# Altium PCB Board_Layout.PcbDoc (part 1 of 2)
Units mil, origin at the board's own origin, x right, y up, seen from the top; angles counter-clockwise.
Board outline 4005 x 2010 mil, 4 copper layers (Top Layer, Power, Ground, Bottom Layer); 140 components, 129 nets, 567 pads, 245 vias.
Unrouted connection lines stored in the file: 278.
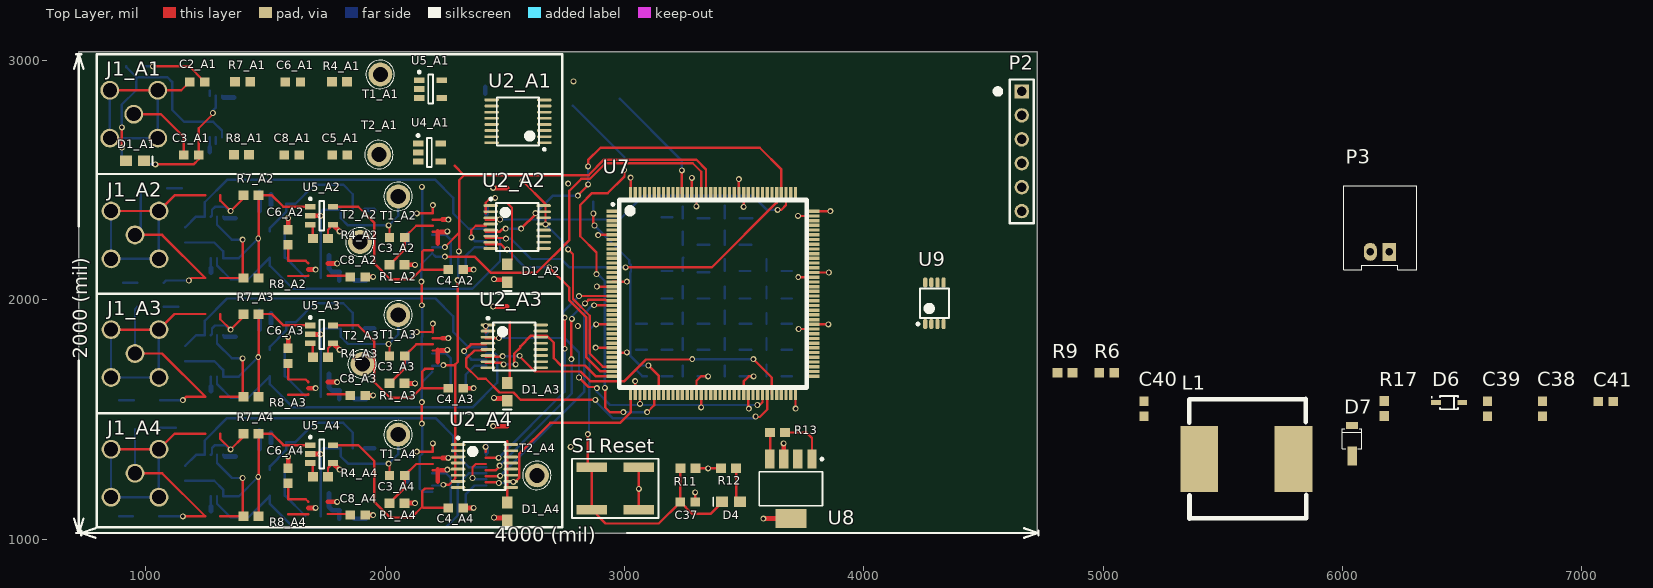
[diagram p0: Top Layer view]
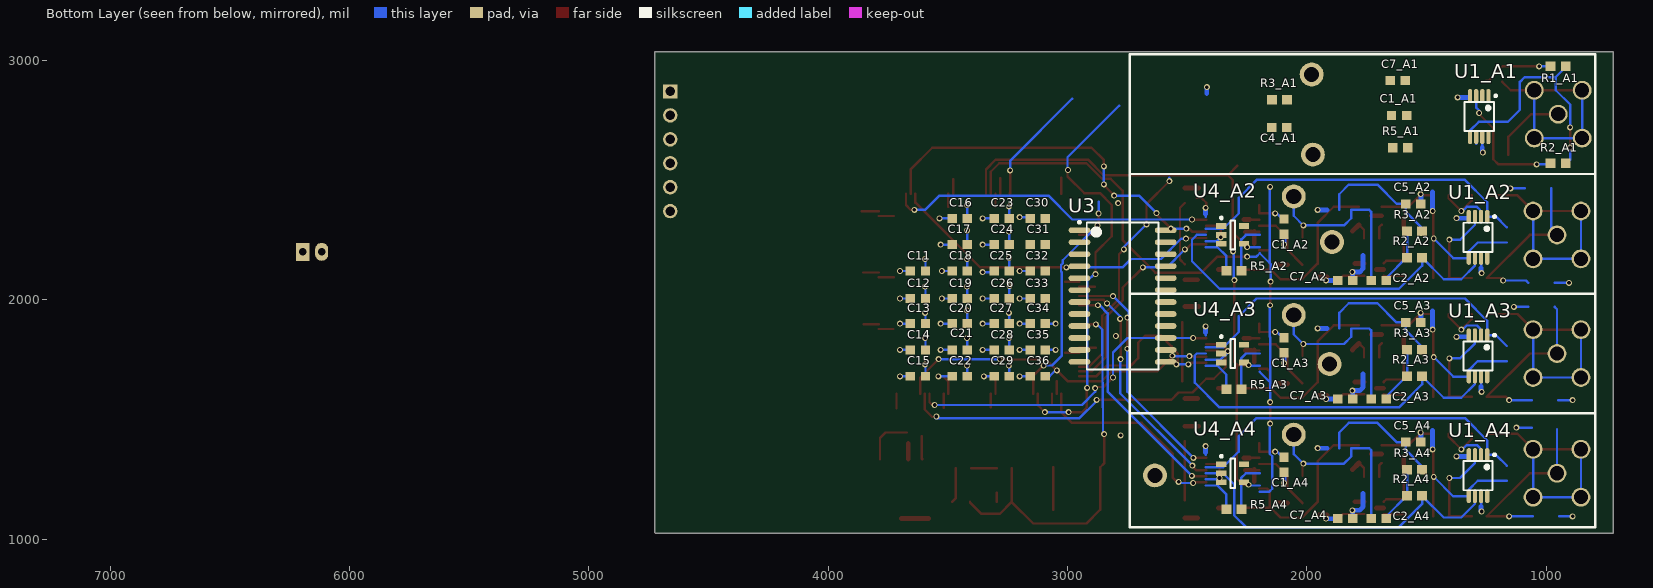
[diagram p1: Bottom Layer view, seen from below]
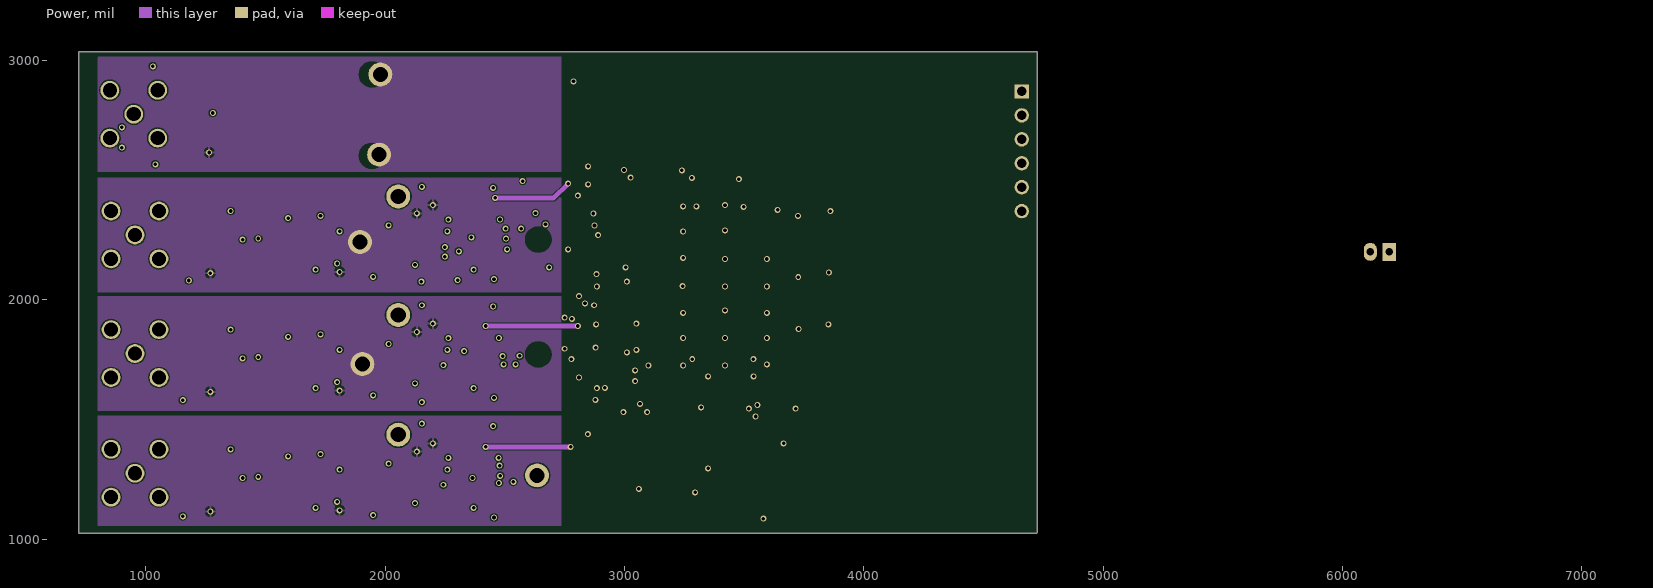
[diagram p2: Power]
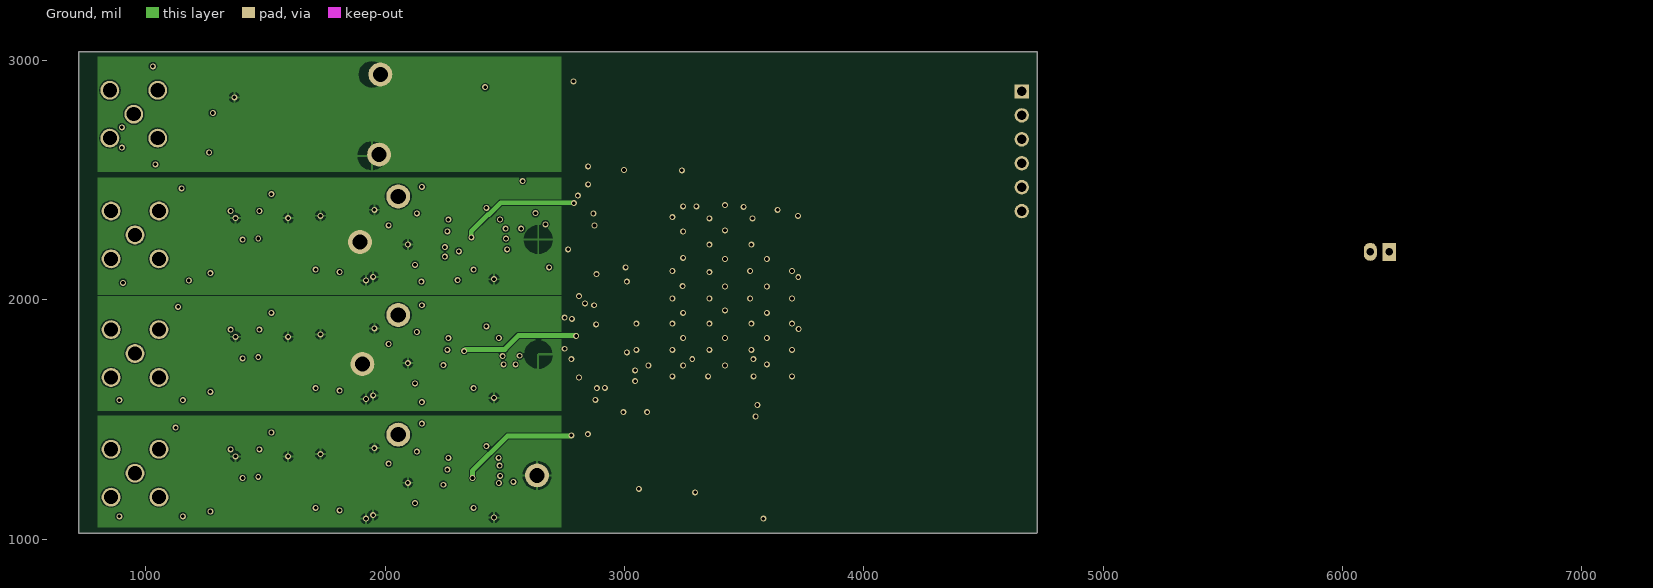
[diagram p3: Ground]

## Layer stack, top to bottom
Top Layer: signal copper 1.4
Dielectric: core 12.6, FR-4, Dk 4.8
Power: signal copper 1.4
Dielectric: prepreg 12.6, FR-4, Dk 4.8
Ground: signal copper 1.4
Dielectric: core 12.6, FR-4, Dk 4.8
Bottom Layer: signal copper 1.4

## Board outline
4725,3035 720,3035 720,1025 4721.67,1025 4725,1028.33 4725,3035

## Design rules (kind name [scope] priority, off if disabled: settings)
Clearance [All] p1: gap=5
PolygonConnect [All] p1: connectstyle=Relief reliefconductorwidth=10 reliefentries=4 polygonreliefangle="90 Angle" airgapwidth=10
RoomDefinition A2 [InComponentClass('A2')] p1: confinementstyle=ConfineIn formatcopy=TRUE lockcomponents=FALSE outline 800,2030.51 2740,2030.51 2740,2510.51 800,2510.51
RoomDefinition A1 [InComponentClass('A1')] p2: confinementstyle=ConfineIn formatcopy=TRUE lockcomponents=FALSE outline 795,2535 2735,2535 2735,3015 795,3015
RoomDefinition A4 [InComponentClass('A4')] p3: confinementstyle=ConfineIn formatcopy=TRUE lockcomponents=FALSE outline 800,1035 2740,1035 2740,1515 800,1515
RoomDefinition A3 [InComponentClass('A3')] p4: confinementstyle=ConfineIn formatcopy=TRUE lockcomponents=FALSE outline 800,1535 2740,1535 2740,2015 800,2015
RoutingCorners [All] p1: cornerstyle=Round minsetback=100 maxsetback=100
RoutingVias [All] p1: holewidth=15 width=25 viastyle="Through Hole" minholewidth=15 minwidth=25 maxholewidth=28 maxwidth=50
SolderMaskExpansion [All] p1: expansion=4
Width [All] p1: maxlimit=20 minlimit=10 preferedwidth=10
Width APWR [InNetClass('APower')] p2: maxlimit=20 minlimit=20 preferedwidth=20
Width AGND [InNetClass('AGround')] p3: maxlimit=20 minlimit=10 preferedwidth=20
27 further rules are at their usual default settings.

## Classes and differential pairs
channel class Analog: U_Analog1 U_Analog2 U_Analog3 U_Analog4
component class A1: C1_A1 C1_U_Analog4 C2_A1 C2_U_Analog4 C3_A1 C3_U_Analog4 C4_A1 C4_U_Analog4 C5_A1 C5_U_Analog4 C6_A1 C6_U_Analog4 C7_A1 C7_U_Analog4 C8_A1 C8_U_Analog4 D1_A1 J1_A1 R1_A1 R1_U_Analog4 R2_A1 R2_U_Analog4 R3_A1 R3_U_Analog4 R4_A1 R4_U_Analog4 R5_A1 R5_U_Analog4 R6_U_Analog4 R7_A1 R8_A1 T1_A1 T1_U_Analog4 T2_A1 U1_A1 U2_A1 U4_A1 U5_A1
component class A2: C1_A2 C1_U_Analog3 C2_A2 C2_U_Analog3 C3_A2 C3_U_Analog3 C4_A2 C4_U_Analog3 C5_A2 C5_U_Analog3 C6_A2 C6_U_Analog3 C7_A2 C7_U_Analog3 C8_A2 C8_U_Analog3 D1_A2 J1_A2 R1_A2 R1_U_Analog3 R2_A2 R2_U_Analog3 R3_A2 R3_U_Analog3 R4_A2 R4_U_Analog3 R5_A2 R5_U_Analog3 R6_U_Analog3 R7_A2 R8_A2 T1_A2 T1_U_Analog3 T2_A2 U1_A2 U2_A2 U4_A2 U5_A2
component class A3: C1_A3 C1_U_Analog2 C2_A3 C2_U_Analog2 C3_A3 C3_U_Analog2 C4_A3 C4_U_Analog2 C5_A3 C5_U_Analog2 C6_A3 C6_U_Analog2 C7_A3 C7_U_Analog2 C8_A3 C8_U_Analog2 D1_A3 J1_A3 R1_A3 R1_U_Analog2 R2_A3 R2_U_Analog2 R3_A3 R3_U_Analog2 R4_A3 R4_U_Analog2 R5_A3 R5_U_Analog2 R6_U_Analog2 R7_A3 R8_A3 T1_A3 T1_U_Analog2 T2_A3 U1_A3 U2_A3 U4_A3 U5_A3
component class A4: C1_A4 C1_U_Analog1 C2_A4 C2_U_Analog1 C3_A4 C3_U_Analog1 C4_A4 C4_U_Analog1 C5_A4 C5_U_Analog1 C6_A4 C6_U_Analog1 C7_A4 C7_U_Analog1 C8_A4 C8_U_Analog1 D1_A4 J1_A4 R1_A4 R1_U_Analog1 R2_A4 R2_U_Analog1 R3_A4 R3_U_Analog1 R4_A4 R4_U_Analog1 R5_A4 R5_U_Analog1 R6_U_Analog1 R7_A4 R8_A4 T1_A4 T1_U_Analog1 T2_A4 U1_A4 U2_A4 U4_A4 U5_A4
net class AGround: AGND_A1 AGND_A2 AGND_A3 AGND_A4
net class APower: 4.2V_A1 4.2V_A2 4.2V_A3 4.2V_A4
component class U_Digital: C11 C12 C13 C14 C15 C16 C17 C18 C19 C20 C21 C22 C23 C24 C25 C26 C27 C28 C29 C30 C31 C32 C33 C34 C35 C36 C37 C38 C39 C40 C41 D4 D6 D7 L1 P2 P3 R6 R9 R11 R12 R13 R17 S1 U3 U7 U8 U9

## Components (designator, comment, footprint, x,y, rotation, side; value= is the part's Value field where it differs from the comment)
C1_A1 "Cap" CAPC0603 1615,2770 r180 bottom (schematic designator C1)
C1_A2 "Cap" CAPC0603 2095,2305.51 r90 bottom (schematic designator C1)
C1_A3 "Cap" CAPC0603 2095,1810 r90 bottom (schematic designator C1)
C1_A4 "Cap" CAPC0603 2095,1310 r90 bottom (schematic designator C1)
C2_A1 "Cap" CAPC0603 1215,2910 r0 top (schematic designator C2)
C2_A2 "Cap" CAPC0603 1700,2080.51 r0 bottom (schematic designator C2)
C2_A3 "Cap" CAPC0603 1700,1585 r0 bottom (schematic designator C2)
C2_A4 "Cap" CAPC0603 1700,1085 r0 bottom (schematic designator C2)
C3_A1 "Cap" CAPC0603 1190,2605 r0 top (schematic designator C3)
C3_A2 "Cap" CAPC0603 2050,2260.51 r0 top (schematic designator C3)
C3_A3 "Cap" CAPC0603 2050,1765 r0 top (schematic designator C3)
C3_A4 "Cap" CAPC0603 2050,1265 r0 top (schematic designator C3)
C4_A1 "Cap" CAPC0603 2115,2720 r0 bottom (schematic designator C4)
C4_A2 "Cap" CAPC0603 2295,2125.51 r180 top (schematic designator C4)
C4_A3 "Cap" CAPC0603 2295,1630 r180 top (schematic designator C4)
C4_A4 "Cap" CAPC0603 2295,1130 r180 top (schematic designator C4)
C5_A1 "Cap" CAPC0603 1810,2605 r0 top (schematic designator C5)
C5_A2 "Cap" CAPC0603 1555,2400.51 r180 bottom (schematic designator C5)
C5_A3 "Cap" CAPC0603 1555,1905 r180 bottom (schematic designator C5)
C5_A4 "Cap" CAPC0603 1555,1405 r180 bottom (schematic designator C5)
C6_A1 "Cap" CAPC0603 1615,2910 r180 top (schematic designator C6)
C6_A2 "Cap" CAPC0603 1595,2260.51 r270 top (schematic designator C6)
C6_A3 "Cap" CAPC0603 1595,1765 r270 top (schematic designator C6)
C6_A4 "Cap" CAPC0603 1595,1265 r270 top (schematic designator C6)
C7_A1 "Cap" CAPC0603 1620,2915 r180 bottom (schematic designator C7)
C7_A2 "Cap" CAPC0603 1840,2080.51 r180 bottom (schematic designator C7)
C7_A3 "Cap" CAPC0603 1840,1585 r180 bottom (schematic designator C7)
C7_A4 "Cap" CAPC0603 1840,1085 r180 bottom (schematic designator C7)
C8_A1 "Cap" CAPC0603 1610,2605 r180 top (schematic designator C8)
C8_A2 "Cap" CAPC0603 1885,2095.51 r180 top (schematic designator C8)
C8_A3 "Cap" CAPC0603 1885,1600 r180 top (schematic designator C8)
C8_A4 "Cap" CAPC0603 1885,1100 r180 top (schematic designator C8)
C11 "Cap" CAPC0603 3625,2120 r0 bottom
C12 "Cap" CAPC0603 3625,2005 r0 bottom
C13 "Cap" CAPC0603 3625,1900 r0 bottom
C14 "Cap" CAPC0603 3625,1790 r0 bottom
C15 "Cap" CAPC0603 3625,1680 r0 bottom
C16 "Cap" CAPC0603 3450,2340 r0 bottom
C17 "Cap" CAPC0603 3450,2230 r0 bottom
C18 "Cap" CAPC0603 3450,2120 r0 bottom
C19 "Cap" CAPC0603 3450,2005 r0 bottom
C20 "Cap" CAPC0603 3450,1900 r0 bottom
C21 "Cap" CAPC0603 3450,1790 r0 bottom
C22 "Cap" CAPC0603 3450,1680 r0 bottom
C23 "Cap" CAPC0603 3275,2340 r0 bottom
C24 "Cap" CAPC0603 3275,2230 r0 bottom
C25 "Cap" CAPC0603 3275,2120 r0 bottom
C26 "Cap" CAPC0603 3275,2005 r0 bottom
C27 "Cap" CAPC0603 3275,1900 r0 bottom
C28 "Cap" CAPC0603 3275,1790 r0 bottom
C29 "Cap" CAPC0603 3275,1680 r0 bottom
C30 "Cap" CAPC0603 3125,2340 r0 bottom
C31 "Cap" CAPC0603 3125,2230 r0 bottom
C32 "Cap" CAPC0603 3125,2120 r0 bottom
C33 "Cap" CAPC0603 3125,2005 r0 bottom
C34 "Cap" CAPC0603 3125,1900 r0 bottom
C35 "Cap" CAPC0603 3125,1790 r0 bottom
C36 "Cap" CAPC0603 3125,1680 r0 bottom
C37 "Cap" CAPC0603 3265,1155 r0 top
C38 "Cap" CAPC0603 6835,1545 r90 top
C39 "Cap" CAPC0603 6605,1545 r90 top
C40 "Cap" CAPC0603 5170,1545 r90 top
C41 "Cap" CAPC0603 7100,1575 r0 top
D1_A1 "LED-RED" LED0805-RED 955,2580 r180 top (schematic designator D1)
D1_A2 "LED-RED" LED0805-RED 2510,2110.51 r90 top (schematic designator D1)
D1_A3 "LED-RED" LED0805-RED 2510,1615 r90 top (schematic designator D1)
D1_A4 "LED-RED" LED0805-RED 2510,1115 r90 top (schematic designator D1)
D4 "LED-RED" LED0805-RED 3445,1155 r0 top
D6 "Schottky" SOD-323F 6445,1570 r0 top
D7 "UPS120" DO-216AA 6040,1475 r90 top
J1_A1 "MCX_Female_RA" MCX_Female 950,2775 r0 top (schematic designator J1)
J1_A2 "MCX_Female_RA" MCX_Female 955,2270.51 r0 top (schematic designator J1)
J1_A3 "MCX_Female_RA" MCX_Female 955,1775 r0 top (schematic designator J1)
J1_A4 "MCX_Female_RA" MCX_Female 955,1275 r0 top (schematic designator J1)
L1 "5uH" IND_2 5795,1335 r0 top
P2 "SWD" SWD_STM32 4660,2870 r0 top
P3 "2-pin Horz Sherlock" MOLEX-HDR-1X2-SHERLOCK-HORZ 6195,2200 r0 top
R1_A1 "Res" RES0603 950,2975 r0 bottom (schematic designator R1)
R1_A2 "Res" RES0603 2050,2145.51 r180 top (schematic designator R1)
R1_A3 "Res" RES0603 2050,1650 r180 top (schematic designator R1)
R1_A4 "Res" RES0603 2050,1150 r180 top (schematic designator R1)
R2_A1 "Res" RES0603 950,2570 r180 bottom (schematic designator R2)
R2_A2 "Res" RES0603 1550,2175.51 r0 bottom (schematic designator R2)
R2_A3 "Res" RES0603 1550,1680 r0 bottom (schematic designator R2)
R2_A4 "Res" RES0603 1550,1180 r0 bottom (schematic designator R2)
R3_A1 "Res" RES0603 2115,2835 r180 bottom (schematic designator R3)
R3_A2 "Res" RES0603 1550,2285.51 r180 bottom (schematic designator R3)
R3_A3 "Res" RES0603 1550,1790 r180 bottom (schematic designator R3)
R3_A4 "Res" RES0603 1550,1290 r180 bottom (schematic designator R3)
R4_A1 "Res" RES0603 1810,2910 r0 top (schematic designator R4)
R4_A2 "Res" RES0603 1730,2255.51 r0 top (schematic designator R4)
R4_A3 "Res" RES0603 1730,1760 r0 top (schematic designator R4)
R4_A4 "Res" RES0603 1730,1260 r0 top (schematic designator R4)
R5_A1 "Res" RES0603 1610,2635 r180 bottom (schematic designator R5)
R5_A2 "Res" RES0603 2305,2120.51 r180 bottom (schematic designator R5)
R5_A3 "Res" RES0603 2305,1625 r180 bottom (schematic designator R5)
R5_A4 "Res" RES0603 2305,1125 r180 bottom (schematic designator R5)
R6 "Res" RES0603 5015,1695 r0 top
R7_A1 "Res" RES0603 1405,2910 r180 top (schematic designator R7)
R7_A2 "Res" RES0603 1440,2435.51 r180 top (schematic designator R7)
R7_A3 "Res" RES0603 1440,1940 r180 top (schematic designator R7)
R7_A4 "Res" RES0603 1440,1440 r180 top (schematic designator R7)
R8_A1 "Res" RES0603 1400,2605 r0 top (schematic designator R8)
R8_A2 "Res" RES0603 1440,2090.51 r0 top (schematic designator R8)
R8_A3 "Res" RES0603 1440,1595 r0 top (schematic designator R8)
R8_A4 "Res" RES0603 1440,1095 r0 top (schematic designator R8)
R9 "Res" RES0603 4840,1695 r0 top
R11 "Res" RES0603 3265,1295 r180 top
R12 "Res" RES0603 3435,1295 r0 top
R13 "Res" RES0603 3640,1445 r0 top
R17 "Res" RES0603 6175,1545 r90 top
S1 "PBSW" PBSW 3060,1300 r180 top
T1_A1 "Test_Point" TP 1980,2940 r90 top (schematic designator T1)
T1_A2 "Test_Point" TP 2055,2430.51 r90 top (schematic designator T1)
T1_A3 "Test_Point" TP 2055,1935 r90 top (schematic designator T1)
T1_A4 "Test_Point" TP 2055,1435 r90 top (schematic designator T1)
T2_A1 "Test_Point" TP 1975,2605 r90 top (schematic designator T2)
T2_A2 "Test_Point" TP 1895,2240 r90 top (schematic designator T2)
T2_A3 "Test_Point" TP 1905,1730 r90 top (schematic designator T2)
T2_A4 "Test_Point" TP 2635,1265 r90 top (schematic designator T2)
U1_A1 "Inst. Amp" TSSOP-8n 1280,2765 r270 bottom (schematic designator U1)
U1_A2 "Inst. Amp" TSSOP-8n 1285,2260.51 r270 bottom (schematic designator U1)
U1_A3 "Inst. Amp" TSSOP-8n 1285,1765 r270 bottom (schematic designator U1)
U1_A4 "Inst. Amp" TSSOP-8n 1285,1265 r270 bottom (schematic designator U1)
U2_A1 "ADC 16bit 500k" TSSOP-16pin 2555,2745 r180 top (schematic designator U2)
U2_A2 "ADC 16bit 500k" TSSOP-16pin 2551.76,2303.58 r0 top (schematic designator U2)
U2_A3 "ADC 16bit 500k" TSSOP-16pin 2540,1805 r0 top (schematic designator U2)
U2_A4 "ADC 16bit 500k" TSSOP-16pin 2415,1305 r0 top (schematic designator U2)
U3 "AD8403" SOIC-24n 2770,2015 r180 bottom
U4_A1 "REF2041" SOT23-5 2185,2615 r0 top (schematic designator U4)
U4_A2 "REF2041" SOT23-5 2310,2270.51 r180 bottom (schematic designator U4)
U4_A3 "REF2041" SOT23-5 2310,1775 r180 bottom (schematic designator U4)
U4_A4 "REF2041" SOT23-5 2310,1275 r180 bottom (schematic designator U4)
U5_A1 "LDO 4.2V" SOT23-5 2190,2880 r0 top (schematic designator U5)
U5_A2 "LDO 4.2V" SOT23-5 1735,2350.51 r0 top (schematic designator U5)
U5_A3 "LDO 4.2V" SOT23-5 1735,1855 r0 top (schematic designator U5)
U5_A4 "LDO 4.2V" SOT23-5 1735,1355 r0 top (schematic designator U5)
U7 "STM32F429-144" LQFP-144 3370,2025 r0 top
U8 "3.3V LDO REG" SOT223-8N 3695,1210 r270 top
U9 "LT1767-5" MSOP-8n 4295,1985 r90 top

## Footprints (in the part's own frame and the unit in brackets; to place one, negate y for a bottom-side part, rotate by r counter-clockwise, add the part's x,y. Pads: shape width x height; smd on the part's side, far side on the other; paste and mask are expansions set on the pad)
CAPC0603 [mm] "Chip Capacitor, 2-Leads, Body 1.60x0.80mm, IPC Medium Density"
  rect 1x0.95 smd: 1(-0.8,0) 2(0.8,0)
  body extent -0.88,-0.48 0.87,0.48, height 0.8
DO-216AA [mm] "UPS120"
  rect 0.76x1.27 smd: A(0,0)
  rect 2x1 smd: C(-3.25,0)
  silkscreen extent -2.5,-1.02 -0.38,1.02, body extent -2.49,-0.99 -0.46,1.04, height 1
IND_2 [mm] "Inductor"
  rect 4x7 smd: 1(0,0) 2(-10,0)
  silkscreen extent -11.06,-6.34 1.36,6.35, body extent -11.06,-6.33 1.32,6.31, height 6.5
LED0805-RED [mm] "Molded Diode, 2-Leads, Body 2.0x1.3mm, IPC Medium Density"
  rect 1.25x1.1 smd: 1(-0.95,0) 2(0.95,0)
  silkscreen extent -1.88,-0.45 -1.88,0.45, body extent -1.01,-0.62 1.01,0.63, height 1.1
LQFP-144 [mm] "For STM32F407"
  rect 1.35x0.35 smd: 1(-10.625,8.75) 2(-10.625,8.25) 3(-10.625,7.75) 4(-10.625,7.25) 5(-10.625,6.75) 6(-10.625,6.25) 7(-10.625,5.75) 8(-10.625,5.25) 9(-10.625,4.75) 10(-10.625,4.25) 11(-10.625,3.75) 12(-10.625,3.25) 13(-10.625,2.75) 14(-10.625,2.25) 15(-10.625,1.75) 16(-10.625,1.25) 17(-10.625,0.75) 18(-10.625,0.25) 19(-10.625,-0.25) 20(-10.625,-0.75) 21(-10.625,-1.25) 22(-10.625,-1.75) 23(-10.625,-2.25) 24(-10.625,-2.75) 25(-10.625,-3.25) 26(-10.625,-3.75) 27(-10.625,-4.25) 28(-10.625,-4.75) 29(-10.625,-5.25) 30(-10.625,-5.75) 31(-10.625,-6.25) 32(-10.625,-6.75) 33(-10.625,-7.25) 34(-10.625,-7.75) 35(-10.625,-8.25) 36(-10.625,-8.75) 73(10.625,-8.75) 74(10.625,-8.25) 75(10.625,-7.75) 76(10.625,-7.25) 77(10.625,-6.75) 78(10.625,-6.25) 79(10.625,-5.75) 80(10.625,-5.25) 81(10.625,-4.75) 82(10.625,-4.25) 83(10.625,-3.75) 84(10.625,-3.25) 85(10.625,-2.75) 86(10.625,-2.25) 87(10.625,-1.75) 88(10.625,-1.25) 89(10.625,-0.75) 90(10.625,-0.25) 91(10.625,0.25) 92(10.625,0.75) 93(10.625,1.25) 94(10.625,1.75) 95(10.625,2.25) 96(10.625,2.75) 97(10.625,3.25) 98(10.625,3.75) 99(10.625,4.25) 100(10.625,4.75) 101(10.625,5.25) 102(10.625,5.75) 103(10.625,6.25) 104(10.625,6.75) 105(10.625,7.25) 106(10.625,7.75) 107(10.625,8.25) 108(10.625,8.75)
  rect 0.35x1.35 smd: 37(-8.75,-10.625) 38(-8.25,-10.625) 39(-7.75,-10.625) 40(-7.25,-10.625) 41(-6.75,-10.625) 42(-6.25,-10.625) 43(-5.75,-10.625) 44(-5.25,-10.625) 45(-4.75,-10.625) 46(-4.25,-10.625) 47(-3.75,-10.625) 48(-3.25,-10.625) 49(-2.75,-10.625) 50(-2.25,-10.625) 51(-1.75,-10.625) 52(-1.25,-10.625) 53(-0.75,-10.625) 54(-0.25,-10.625) 55(0.25,-10.625) 56(0.75,-10.625) 57(1.25,-10.625) 58(1.75,-10.625) 59(2.25,-10.625) 60(2.75,-10.625) 61(3.25,-10.625) 62(3.75,-10.625) 63(4.25,-10.625) 64(4.75,-10.625) 65(5.25,-10.625) 66(5.75,-10.625) 67(6.25,-10.625) 68(6.75,-10.625) 69(7.25,-10.625) 70(7.75,-10.625) 71(8.25,-10.625) 72(8.75,-10.625) 109(8.75,10.625) 110(8.25,10.625) 111(7.75,10.625) 112(7.25,10.625) 113(6.75,10.625) 114(6.25,10.625) 115(5.75,10.625) 116(5.25,10.625) 117(4.75,10.625) 118(4.25,10.625) 119(3.75,10.625) 120(3.25,10.625) 121(2.75,10.625) 122(2.25,10.625) 123(1.75,10.625) 124(1.25,10.625) 125(0.75,10.625) 126(0.25,10.625) 127(-0.25,10.625) 128(-0.75,10.625) 129(-1.25,10.625) 130(-1.75,10.625) 131(-2.25,10.625) 132(-2.75,10.625) 133(-3.25,10.625) 134(-3.75,10.625) 135(-4.25,10.625) 136(-4.75,10.625) 137(-5.25,10.625) 138(-5.75,10.625) 139(-6.25,10.625) 140(-6.75,10.625) 141(-7.25,10.625) 142(-7.75,10.625) 143(-8.25,10.625) 144(-8.75,10.625)
  silkscreen extent -10.75,-9.95 9.95,9.95, body extent -9.95,-9.95 9.95,9.95, height 1.6
MCX_Female [mm] "MCX_female CONN JACK RCPT R/A"
  round 2 hole 1.5: 1(0,0) 2(-2.54,-2.54) 2(-2.54,2.54) 2(2.54,-2.54) 2(2.54,2.54)
  body extent -2.95,-3.07 6.55,2.93, height 5.9
MOLEX-HDR-1X2-SHERLOCK-HORZ [mm]
  rect 1.397x1.905 hole 0.8: 1(0,0)
  oval 1.397x1.905 hole 0.8: 2(-2,0)
  silkscreen extent -4.83,-1.91 2.92,6.98, body extent -4.83,-1.91 2.87,8.59, height 5.54
MSOP-8n [mm] "LT1767"
  oval 1.1x0.45 smd: 1(-2.2,0.975) 2(-2.2,0.325) 3(-2.2,-0.325) 4(-2.2,-0.975) 5(2.2,-0.975) 6(2.2,-0.325) 7(2.2,0.325) 8(2.2,0.975)
  silkscreen extent -2.32,-1.55 1.55,1.87, body extent -1.55,-1.55 1.55,1.55, height 1.1
PBSW [mm]
  rect 3.2x1 smd: 1(0,0) 2(5,0) 3(5,4.5) 4(0,4.5)
  silkscreen extent -2.1,-0.9 7.1,5.4, body extent -2,-0.75 7,5.25, height 5
RES0603 [mm] "Chip Resistor, 2-Leads, Body 1.60x0.80mm, IPC Medium Density"
  rect 1.05x1 smd: 1(-0.8,0) 2(0.8,0)
  body extent -0.88,-0.48 0.87,0.47, height 0.8
SOD-323F [mm] "Molded Diode, 2-Leads, Body 1.70x1.25mm, IPC Medium Density"
  rect 1.05x0.55 smd: A(-1.4,0) C(1.4,0)
  silkscreen extent -1.87,-0.7 0.95,0.7, body extent -0.9,-0.67 0.9,0.67, height 1
SOIC-24n [mm]
  oval 2.3x0.6 smd: 1(-4.575,6.985) 2(-4.575,5.715) 3(-4.575,4.445) 4(-4.575,3.175) 5(-4.575,1.905) 6(-4.575,0.635) 7(-4.575,-0.635) 8(-4.575,-1.905) 9(-4.575,-3.175) 10(-4.575,-4.445) 11(-4.575,-5.715) 12(-4.575,-6.985) 13(4.575,-6.985) 14(4.575,-5.715) 15(4.575,-4.445) 16(4.575,-3.175) 17(4.575,-1.905) 18(4.575,-0.635) 19(4.575,0.635) 20(4.575,1.905) 21(4.575,3.175) 22(4.575,4.445) 23(4.575,5.715) 24(4.575,6.985)
  silkscreen extent -4.7,-7.8 3.8,7.96, body extent -3.8,-7.8 3.8,7.8, height 1.2
SOT23-5 [mm] "Used for LP2992"
  rect 1.1x0.6 smd: 1(-1.2,0.95) 2(-1.2,0) 3(-1.2,-0.95) 4(1.2,-0.95) 5(1.2,0.95)
  silkscreen extent -1.32,-1.55 0.25,1.92, body extent -0.87,-1.52 0.87,1.53, height 0.25
SOT223-8N [mm] "3.3V LDO"
  rect 2x1 smd: 1(-3.15,2.25) 2(-3.15,0.75) 3(-3.15,-0.75) 4(-3.15,-2.25)
  rect 2x3.3 smd: 5(3.15,0)
  silkscreen extent -3.27,-3.35 1.8,3.43, body extent -1.85,-3.35 1.85,3.35, height 1.8
SWD_STM32 [mil] "SWD connector matching the pinout on STM Discovery Boards"
  rect 60x60 hole 39.37: 1(0,0)
  round 60 hole 39.37: 2(0,-100) 3(0,-200) 4(0,-300) 5(0,-400) 6(0,-500)
  silkscreen extent -110,-550 50,50
TP [mm]
  round 2.54 hole 1.6: 1(0.025,0)
  silkscreen extent -1.49,-1.49 1.54,1.53, body extent -1.59,-1.59 1.59,1.59, height 5.58
TSSOP-8n [mm]
  oval 1.45x0.45 smd: 1(-2.2,0.975) 2(-2.2,0.325) 3(-2.2,-0.325) 4(-2.2,-0.975) 5(2.2,-0.975) 6(2.2,-0.325) 7(2.2,0.325) 8(2.2,0.975)
  silkscreen extent -2.32,-1.55 1.55,1.87, body extent -1.55,-1.55 1.55,1.55, height 1.1
TSSOP-16pin [mm] "For 296-19764-ND"
  oval 1.55x0.3 smd: 1(-2.8,2.275) 2(-2.8,1.625) 3(-2.8,0.975) 4(-2.8,0.325) 5(-2.8,-0.325) 6(-2.8,-0.975) 7(-2.8,-1.625) 8(-2.8,-2.275) 9(2.8,-2.275) 10(2.8,-1.625) 11(2.8,-0.975) 12(2.8,-0.325) 13(2.8,0.325) 14(2.8,0.975) 15(2.8,1.625) 16(2.8,2.275)
  silkscreen extent -2.93,-2.55 2.25,3.1, body extent -2.25,-2.55 2.25,2.55, height 1.2

## Part data
D1_A1 D1_A2 D1_A3 D1_A4 D4: "Light Emitting Diode - RED"
D6: library part CMDSH-3, "DIODE SCHOTTKY 30V 100MA SOD323"
D7: "DIODE SCHOTTKY 20V 1A POWERMITE1"
J1_A1 J1_A2 J1_A3 J1_A4: "CONN MCX JACK R/A 50 OHM PCB"
L1: library part SRR1206-5R0ML, "FIXED IND 5UH 4.7A 22 MOHM SMD"
P2: library part SWD_STM32, "SWD connector matching the pinout on STM Discovery Boards"
P3: library part MOLEX-HDR-1x2-SHERLOCK_RA, "Header, Molex, 2mm Pitch Sherlock Header, Single Row, Horizontal, 2 Circuits, Length 3.3mm,  0353630260"
S1: library part SW-PB, "Push Button Switch"
T1_A1 T1_A2 T1_A3 T1_A4 T2_A1 T2_A2 T2_A3 T2_A4: "TEST POINT PC COMPACT .063\"D"
U1_A1 U1_A2 U1_A3 U1_A4: library part INA331, "IC OPAMP INSTR 2MHZ RRO 8VSSOP"
U2_A1 U2_A2 U2_A3 U2_A4: "IC ADC 16BIT 500KSPS 16-TSSOP"
U3: "IC POT DGTL 8BIT 100K 4CH 24SOIC"
U4_A1 U4_A2 U4_A3 U4_A4: "IC VREF SERIES 2.05V/4.096V 5SOT"
U5_A1 U5_A2 U5_A3 U5_A4: library part "LDO 4.2V 200mA", "IC REG LDO 4.2V 0.2A 5SOT"
U7: "IC MCU ARM 2MB FLASH 144LQFP"
U8: library part LP38691, "IC REG LDO 3.3V 0.5A SOT223-5"
U9: "IC REG BUCK 5V 1.5A 8MSOP"

## Via types
v1: diameter 25, hole 15, Top Layer to Bottom Layer, tented both sides, 89 vias
v2: diameter 25, hole 15, Ground to Bottom Layer, tented bottom, 55 vias
v3: diameter 25, hole 15, Top Layer to Ground, tented top, 39 vias
v4: diameter 25, hole 15, Top Layer to Power, tented top, 33 vias
v5: diameter 25, hole 15, Power to Bottom Layer, tented bottom, 29 vias

## Nets (pads, with @x,y where several pads share a name; then routed paths per layer and width w, separated by ;. In a path a pad name is that pad's centre, name@x,y a point inside that pad or via, vN(x,y) a via of type N, cw(c..) or ccw(c..) an arc to the next point about the centre after c; other vN are vias at no path point)
1: S1.2
2.048V_A1: R1_A1.1 R2_A1.2 R4_A1.1 U1_A1.5 U4_A1.1 | length 995
  Top Layer w10: v1@900,2640 v1(900,2720)
  Bottom Layer w10: v1(900,2635) 900,2583.5 R2_A1.2@913.5,2570 ; v1(900,2720) 900,2815 960,2875 960,2930 ; R1_A1.1@918.5,2975 918.5,2971.5 960,2930 ; U1_A1.5@1318.39,2678.39 1318.39,2706.61 1281.5,2743.5 1160,2743.5 1110,2793.5 1110,2910 1090,2930 960,2930
2.048V_A2: R1_A2.1 R2_A2.2 R4_A2.1 U1_A2.5 U4_A2.1 | length 1006.8
  Top Layer w10: 1471.5,2090.51 1471.5,2195.51 1471.5,2435.51 1527.4,2435.51 1575,2387.91 1687.76,2387.91
  Top Layer w20: R1_A2.1@2081.5,2145.51 v3(2125,2145.51)
  Bottom Layer w10: 1165,2239.02 1286.5,2239.02 1323.39,2202.13 U1_A2.5@1323.39,2173.9 1388.39,2173.9 v1(1470,2255.51)
2.048V_A3: R1_A3.1 R2_A3.2 R4_A3.1 U1_A3.5 U4_A3.1 | length 1006.8
  Top Layer w10: 1471.5,1595 1471.5,1700 1471.5,1940 1527.4,1940 1575,1892.4 1687.76,1892.4
  Top Layer w20: R1_A3.1@2081.5,1650 v3(2125,1650)
  Bottom Layer w10: 1165,1743.5 1286.5,1743.5 1323.39,1706.61 U1_A3.5@1323.39,1678.39 1388.39,1678.39 v1(1470,1760)
2.048V_A4: R1_A4.1 R2_A4.2 R4_A4.1 U1_A4.5 U4_A4.1 | length 1006.8
  Top Layer w10: 1471.5,1095 1471.5,1200 1471.5,1440 1527.4,1440 1575,1392.4 1687.76,1392.4
  Top Layer w20: R1_A4.1@2081.5,1150 v3(2125,1150)
  Bottom Layer w10: 1165,1243.5 1286.5,1243.5 1323.39,1206.61 U1_A4.5@1323.39,1178.39 1388.39,1178.39 v1(1470,1260)
3: S1.4
3.3VD: C11.1 C12.1 C13.1 C14.1 C15.1 C16.1 C17.1 C18.1 C19.1 C20.1 C21.1 C22.1 C23.1 C24.1 C25.1 C26.1 C27.1 C28.1 C29.1 C30.1 C31.1 C32.1 C33.1 C34.1 C35.1 C36.1 P2.1 R6.2 R9.1 R11.1 R12.1 U2_A1.16 U2_A2.16 U2_A3.16 U2_A4.16 U3.16 U7.6 U7.17 U7.30 U7.39 U7.52 U7.62 U7.72 U7.84 U7.95 U7.108 U7.121 U7.131 U7.144 U8.3 | length 2065
  Top Layer w10: v4@2881.38,1798.62 U7.30@2951.69,1798.62 ; v4@2885.47,2054.53 U7.17@2951.69,2054.53 ; v4@2891.06,2271.06 U7.6@2951.69,2271.06 ; U7.144@3025.51,2443.31 v4(3025.51,2509.49) ; v4@3064.88,1565 U7.39@3064.88,1606.69 ; U7.131@3281.42,2443.31 v4(3281.42,2508.58) ; R11.1@3296.5,1295 R12.1@3403.5,1295 ; v4@3320.79,1550.79 U7.52@3320.79,1606.69 ; U7.121@3478.27,2443.31 v4(3478.27,2503.27) ; v4@3517.64,1547.36 U7.62@3517.64,1606.69 ; v4@3714.49,1545.51 U7.72@3714.49,1606.69 ; U7.84@3788.31,1897.05 v4(3852.05,1897.05) ; U7.95@3788.31,2113.58 v4(3853.58,2113.58) ; U7.108@3788.31,2369.49 v4@3859.49,2369.49
  Top Layer w20: U8.3@3665.47,1334.02 v4@3665.47,1399.53
  Bottom Layer w10: v5(3045,1705) 3050,1705 3075,1680 C36.1@3093.5,1680 ; v5(3050,1790) C35.1@3093.5,1790 ; v5(3050,1900) C34.1@3093.5,1900 ; C29.1@3243.5,1680 v5@3243.5,1723.5 ; C28.1@3243.5,1790 v5@3243.5,1840 ; C27.1@3243.5,1900 v5@3243.5,1945 ; C26.1@3243.5,2005 v5(3243.5,2056.5) ; C25.1@3243.5,2120 3243.5,2173.5 v5(3245,2175) ; C24.1@3243.5,2230 v5@3243.5,2283.5 ; C23.1@3243.5,2340 v5@3243.5,2388.5 ; C22.1@3418.5,1680 v5@3418.5,1723.5 ; C21.1@3418.5,1790 v5@3418.5,1838.5 ; C20.1@3418.5,1900 v5@3418.5,1953.5 ; C19.1@3418.5,2005 v5@3418.5,2053.5 ; C18.1@3418.5,2120 v5@3418.5,2168.5 ; C17.1@3418.5,2230 v5@3418.5,2288.5 ; C16.1@3418.5,2340 v5@3418.5,2393.5 ; C15.1@3593.5,1680 v5@3593.5,1728.5 ; C14.1@3593.5,1790 v5@3593.5,1838.5 ; C13.1@3593.5,1900 v5@3593.5,1943.5 ; C12.1@3593.5,2005 v5@3593.5,2053.5 ; C11.1@3593.5,2120 v5@3593.5,2168.5
  other v4: 3350,1295 3665,1400 3520,1545 3715,1545 3320,1550 3065,1565 2880,1800 2885,2055 2890,2270 3860,2370
  other v5: 3245,1725 3420,1725 3595,1730 3245,1840 3420,1840 3595,1840 3245,1945 3595,1945 3420,1955 3420,2055 3595,2055 3420,2170 3595,2170 3245,2285 3420,2290 3245,2390 3420,2395
4.2V_A1: C1_A1.2 C7_A1.2 R5_A1.2 R7_A1.1 U1_A1.7 U2_A1.1 U4_A1.4 U5_A1.5 | length 61.2
  Bottom Layer w10: 1267.2,2637.2 U1_A1.7@1267.2,2678.39
  Bottom Layer w20: v5@1267.2,2617.2 1267.2,2637.2
  other v5: 1265,2615
4.2V_A2: C1_A2.2 C7_A2.2 R5_A2.2 R7_A2.1 U1_A2.7 U2_A2.1 U4_A2.4 U5_A2.5 | length 351.3
  Top Layer w10: v1@2140,2360.51 2199.33,2360.51 2199.76,2360.08 v4(2199.76,2395.28)
  Bottom Layer w10: 1272.2,2132.72 U1_A2.7@1272.2,2173.9 ; C1_A2.2@2095,2337.01 2101.5,2337.01 2125,2360.51 v1@2140,2360.51
  Bottom Layer w20: v5@1272.2,2112.72 1272.2,2132.72 ; 1765,2186.02 1765,2130.51 1780,2115.51 v5(1810,2115.51) ; C7_A2.2@1808.5,2080.51 v5@1808.5,2114.02
  other v1: 2132.5,2360.51
  other v5: 1270,2110.51
4.2V_A3: C1_A3.2 C7_A3.2 R5_A3.2 R7_A3.1 U1_A3.7 U2_A3.1 U4_A3.4 U5_A3.5 | length 351.3
  Top Layer w10: v1(2132.5,1865) 2199.33,1865 2199.76,1864.57 v4(2199.76,1899.76)
  Bottom Layer w10: 1272.2,1637.2 U1_A3.7@1272.2,1678.39 ; C1_A3.2@2095,1841.5 2101.5,1841.5 2125,1865 v1(2132.5,1865)
  Bottom Layer w20: v5@1272.2,1617.2 1272.2,1637.2 ; 1765,1690.51 1765,1635 1780,1620 v5(1810,1620) ; C7_A3.2@1808.5,1585 v5@1808.5,1618.5
  other v5: 1270,1615
4.2V_A4: C1_A4.2 C7_A4.2 R5_A4.2 R7_A4.1 U1_A4.7 U2_A4.1 U4_A4.4 U5_A4.5 | length 351.3
  Top Layer w10: v1(2132.5,1365) 2199.33,1365 2199.76,1364.57 v4(2199.76,1399.76)
  Bottom Layer w10: 1272.2,1137.2 U1_A4.7@1272.2,1178.39 ; C1_A4.2@2095,1341.5 2101.5,1341.5 2125,1365 v1(2132.5,1365)
  Bottom Layer w20: v5@1272.2,1117.2 1272.2,1137.2 ; 1765,1190.51 1765,1135 1780,1120 v5(1810,1120) ; C7_A4.2@1808.5,1085 v5@1808.5,1118.5
  other v5: 1270,1115
4.096V_A1: C5_A1.2 U2_A1.7 U4_A1.5
4.096V_A2: C5_A2.2 U2_A2.7 U4_A2.5 | length 43.5
  Bottom Layer w20: C5_A2.2@1523.5,2395.51 v2@1523.5,2439.02
  other v2: 1525,2440.51
4.096V_A3: C5_A3.2 U2_A3.7 U4_A3.5 | length 43.5
  Bottom Layer w20: C5_A3.2@1523.5,1900 v2@1523.5,1943.5
  other v2: 1525,1945
4.096V_A4: C5_A4.2 U2_A4.7 U4_A4.5 | length 43.5
  Bottom Layer w20: C5_A4.2@1523.5,1400 v2@1523.5,1443.5
  other v2: 1525,1445
5VD: C40.1 D6.A L1.2 R13.1 U8.4 U9.6 | length 96.8
  Top Layer w10: U8.4@3606.42,1334.02 3608.5,1336.1 R13.1@3608.5,1430
ADC_C\S\1: U2_A1.11 U7.34 | length 970.5
  Top Layer w10: v1(2575,2495) 2670,2400 v1(2670,2315) ; v1(2765,2210) 2785,2190 2785,2003.18 2855,1933.18 2855,1775 2910.12,1719.88 U7.34@2951.69,1719.88
  Bottom Layer w10: v1(2575,2495) 2575,2510 ; v1(2670,2315) 2765,2220 v1(2765,2210)
ADC_C\S\2: U2_A2.11 U7.35 | length 880.7
  Top Layer w10: 2420.24,2232.13 2482.87,2232.13 2505,2210 v1(2510,2210) ; v1(2685,2135) 2770,2050 2770,1996.97 2840,1926.97 2840,1760 2899.8,1700.2 U7.35@2951.69,1700.2
  Bottom Layer w10: v1(2510,2210) 2585,2135 v1(2685,2135)
ADC_C\S\3: U2_A3.11 U7.36 | length 728.8
  Top Layer w10: 2420.24,1736.62 2488.38,1736.62 v1(2495,1730) ; v1(2545,1730) 2539.71,1735.29 2539.71,1775.03 2565,1800.32 2565,1805 2610,1850 2675,1850 2705,1820 2705,1755 2735,1725 2835,1725 2879.49,1680.51 U7.36@2951.69,1680.51
  Bottom Layer w10: v1(2495,1730) v1(2545,1730)
ADC_C\S\4: U2_A4.11 U7.37 | length 861.9
  Top Layer w10: 2420.24,1236.62 v1@2473.38,1236.62 ; v1@2535,1240 2545,1240 2560,1255 2560,1355 2690,1485 2981.82,1485 3025.51,1528.69 U7.37@3025.51,1606.69
  Bottom Layer w10: v1(2475.45,1233.96) 2530.45,1233.96 v1(2535.45,1238.96)
AGND_A1: C1_A1.1 C5_A1.1 C6_A1.1 C7_A1.1 C8_A1.1 D1_A1.1 R3_A1.1 T2_A1.1 U1_A1.4 U2_A1.2 U2_A1.4 U2_A1.5 U2_A1.6 U4_A1.2 U5_A1.2 | length 54.4
  Bottom Layer w10: U1_A1.4@1318.39,2851.61 U1_A1.4@1325,2845
  Bottom Layer w20: U1_A1.4@1325,2845 v2(1370,2845)